# Altium PCB main.PcbDoc
Units mil, origin at the board's own origin, x right, y up, seen from the top; angles counter-clockwise.
Board outline 5980 x 2825 mil, 2 copper layers (Top Layer, Bottom Layer); 50 components, 112 nets, 316 pads, 0 vias.
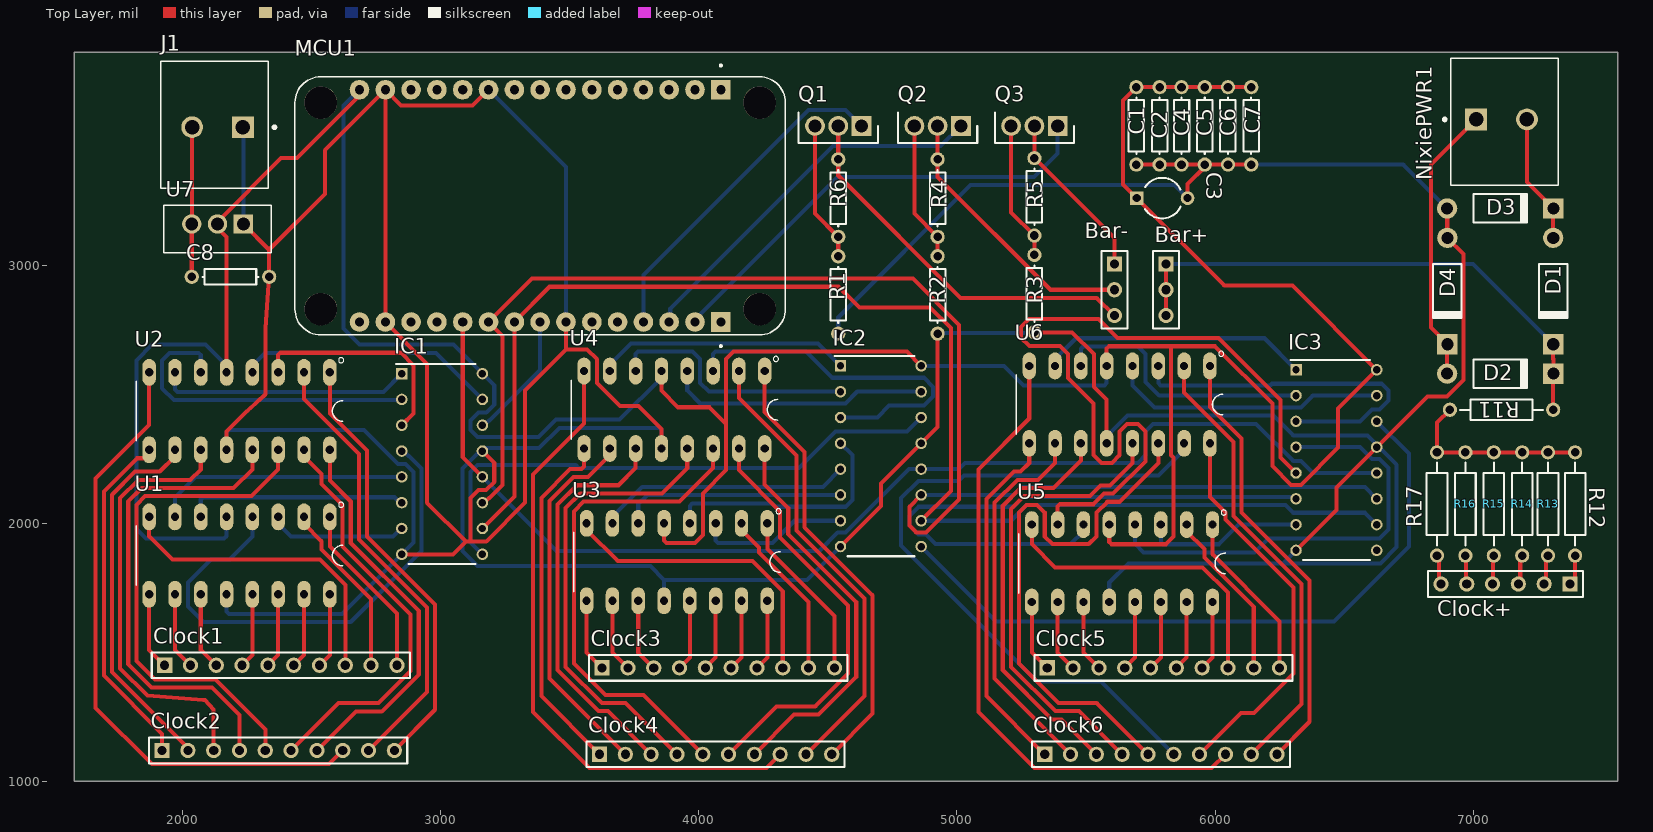
[diagram p0: Top Layer view]
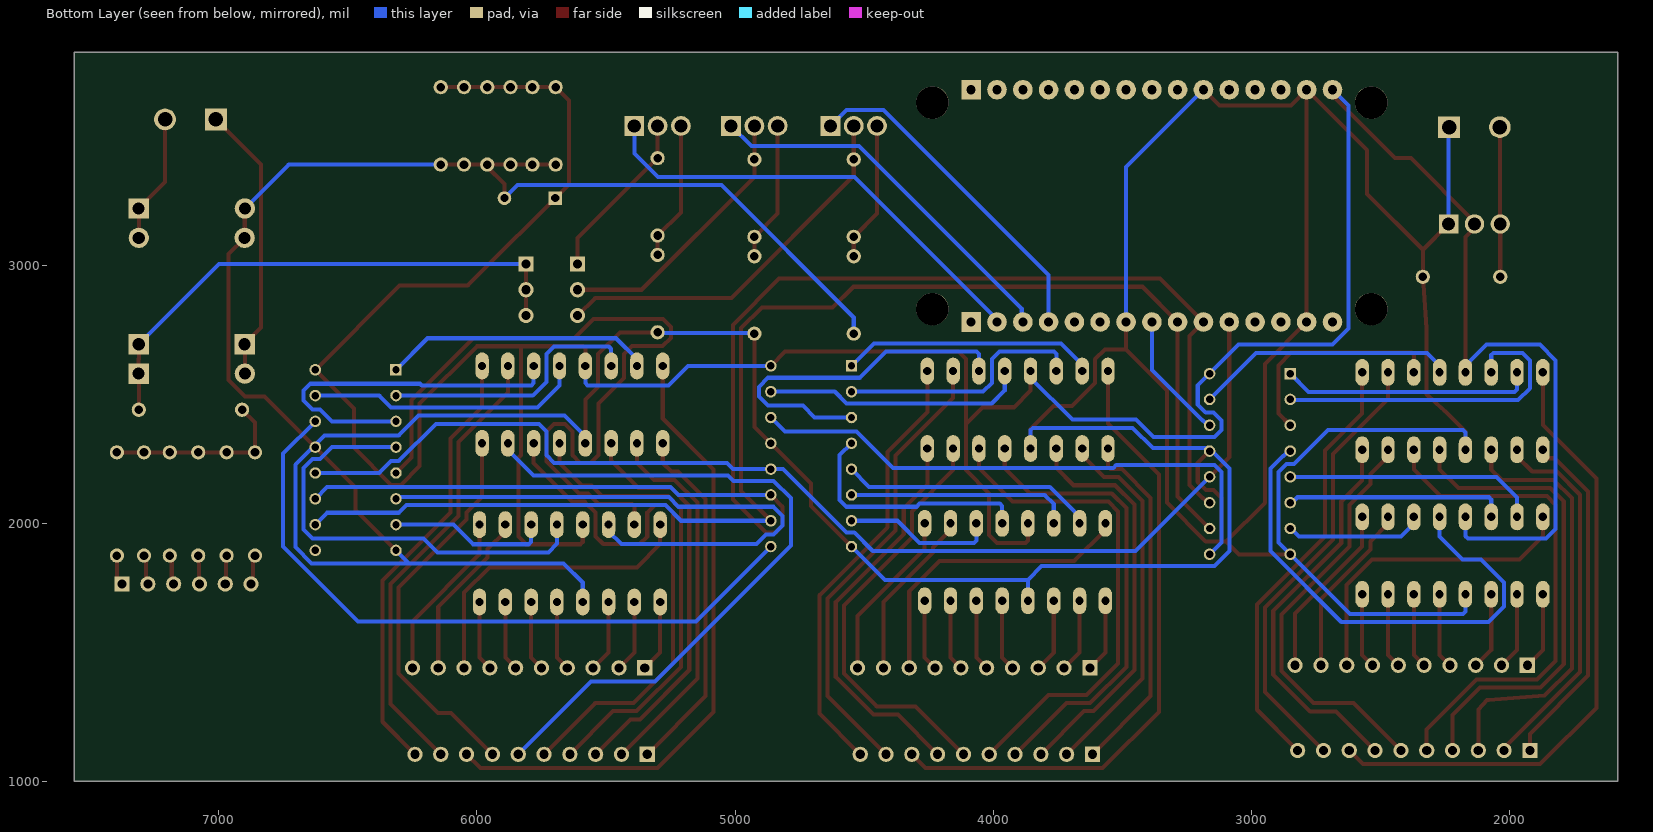
[diagram p1: Bottom Layer view, seen from below]

## Layer stack, top to bottom
Top Solder: solder mask 0.4, Solder Resist, Dk 3.5
Top Layer: signal copper 1.4
Dielectric 1: dielectric 12.6, FR-4, Dk 4.8
Bottom Layer: signal copper 1.4
Bottom Solder: solder mask 0.4, Solder Resist, Dk 3.5

## Board outline
1580,1000 7560,1000 7560,3825 1580,3825

## Design rules (kind name [scope] priority, off if disabled: settings)
Clearance [All] p1: gap=15.75 ignorepadtopadclearanceinfootprint=FALSE
PolygonConnect [All] p1: connectstyle=Relief reliefconductorwidth=10 reliefentries=4 polygonreliefangle="90 Angle" airgapwidth=10
RoomDefinition main [InComponentClass('main')] p1 off: confinementstyle=ConfineIn formatcopy=TRUE lockcomponents=FALSE outline 9355,1015 26315,1015 26315,3055 9355,3055
RoutingTopology [All] p1: topology=Daisy_Balanced
RoutingVias [All] p1: holewidth=19.68 width=51.18 viastyle="Through Hole" minholewidth=19.68 minwidth=51.18 maxholewidth=19.68 maxwidth=51.18
SolderMaskExpansion [All] p1: expansion=4 istentingtop=FALSE
UnRoutedNet [All] p1: checkbadconnections=TRUE
Width [All] p1: maxlimit=15.75 minlimit=15.75 preferedwidth=15.75
28 further rules are at their usual default settings.

## Components (designator, comment, footprint, x,y, rotation, side; value= is the part's Value field where it differs from the comment)
Bar+ "Header 3" HDR1X3 5810,3005 r270 top
Bar- "Header 3" HDR1X3 5610,3005 r270 top
C1 "Cap" AXIAL-0.3 5695,3540 r270 top value=100pF
C2 "Cap" AXIAL-0.3 5785,3540 r270 top value=100pF
C3 "Cap Pol1" CAPR5-4X5 5795,3260 r0 top value=100pF
C4 "Cap" AXIAL-0.3 5870,3540 r90 top value=0.1uF
C5 "Cap" AXIAL-0.3 5960,3540 r90 top value=0.1uF
C6 "Cap" AXIAL-0.3 6050,3540 r90 top value=0.1uF
C7 "Cap" AXIAL-0.3 6140,3540 r90 top value=0.1uF
C8 "Cap" AXIAL-0.3 2185,2955 r180 top value=0.3uF
Clock1 "Header 10" HDR1X10 1930,1450 r0 top
Clock2 "Header 10" HDR1X10 1920,1120 r0 top
Clock3 "Header 10" HDR1X10 3625,1440 r0 top
Clock4 "Header 10" HDR1X10 3615,1105 r0 top
Clock5 "Header 10" HDR1X10 5350,1440 r0 top
Clock6 "Header 10" HDR1X10 5340,1105 r0 top
Clock+ "Header 6" HDR1X6 7375,1765 r180 top (schematic designator Clock+1)
D1 "Diode 1N4001" DO-41 7310,2900 r270 top
D2 "Diode 1N4001" DO-41 7105,2580 r0 top
D3 "Diode 1N4001" DO-41 7105,3220 r0 top
D4 "Diode 1N4001" DO-41 6900,2900 r270 top
IC1 "SN74HC595NE4" DIP794W53P254L1930H508Q16N 3005,2230 r0 top
IC2 "SN74HC595NE4" DIP794W53P254L1930H508Q16N 4705,2260 r0 top
IC3 "SN74HC595NE4" DIP794W53P254L1930H508Q16N 6470,2245 r0 top
J1 "AK300/2-5,0-GRAU" *PTR_AK300/2-5,0-GRAU 2135,3535 r180 top
MCU1 "113990105" *SEEED_113990105_113990105(Primary) 3385,3230 r270 top
NixiePWR1 "AK300/2-5,0-GRAU" *PTR_AK300/2-5,0-GRAU 7110,3565 r0 top
Q1 "MJE13003G" TO229P300X760X1364-3P 4630.16,3540 r180 top
Q2 "MJE13003G" TO229P300X760X1364-3P 5015.16,3540 r180 top
Q3 "MJE13003G" TO229P300X760X1364-3P 5390.16,3540 r180 top
R1 "330" AXIAL-0.3 4540,2885 r270 top
R2 "330" AXIAL-0.3 4925,2885 r270 top
R3 "330" AXIAL-0.3 5300,2890 r270 top
R4 "330" AXIAL-0.3 4925,3260 r270 top
R5 "330" AXIAL-0.3 5300,3265 r270 top
R6 "330" AXIAL-0.3 4540,3260 r270 top
R11 "Res2" AXIAL-0.4 7110,2440 r180 top value=1K
R12 "Res2" AXIAL-0.4 7395,2075 r270 top value=1K
R13 "Res2" AXIAL-0.4 7290,2075 r270 top value=1K
R14 "Res2" AXIAL-0.4 7190,2075 r270 top value=1K
R15 "Res2" AXIAL-0.4 7080,2075 r270 top value=1K
R16 "Res2" AXIAL-0.4 6970,2075 r270 top value=1K
R17 "Res2" AXIAL-0.4 6860,2075 r270 top value=1K
U1 "SN74141N" *DIP762W46P254L2134H508Q16 2220,1875 r270 top
U2 "SN74141N" *DIP762W46P254L2134H508Q16 2220,2435 r270 top
U3 "SN74141N" *DIP762W46P254L2134H508Q16 3915,1850 r270 top
U4 "SN74141N" *DIP762W46P254L2134H508Q16 3905,2440 r270 top
U5 "SN74141N" *DIP762W46P254L2134H508Q16 5640,1845 r270 top
U6 "SN74141N" *DIP762W46P254L2134H508Q16 5630,2460 r270 top
U7 "LM1117T-3.3V" *TO254P470X1016X2222-3P 2035,3120 r180 top

## Footprints (in the part's own frame and the unit in brackets; to place one, negate y for a bottom-side part, rotate by r counter-clockwise, add the part's x,y. Pads: shape width x height; smd on the part's side, far side on the other; paste and mask are expansions set on the pad)
*DIP762W46P254L2134H508Q16 [mil]
  oval 104x52 hole 32: 1(-150,350) 2(-150,250) 3(-150,150) 4(-150,50) 5(-150,-50) 6(-150,-150) 7(-150,-250) 8(-150,-350) 9(150,-350) 10(150,-250) 11(150,-150) 12(150,-50) 13(150,50) 14(150,150) 15(150,250) 16(150,350)
  silkscreen extent -207,-400 115,404
*PTR_AK300/2-5,0-GRAU [mm]
  rect 2.145x2.145 hole 1.43: 1(-2.5,0)
  round 2.145 hole 1.43: 2(2.5,0)
  silkscreen extent -5.74,-6.5 5.6,6
*SEEED_113990105_113990105(Primary) [mm]
  rect 1.93x1.93 hole 0.889: J1_1(-11.43,17.78) J2_1(11.43,17.78)
  round 1.93 hole 0.889: J1_2(-11.43,15.24) J1_3(-11.43,12.7) J1_4(-11.43,10.16) J1_5(-11.43,7.62) J1_6(-11.43,5.08) J1_7(-11.43,2.54) J1_8(-11.43,0) J1_9(-11.43,-2.54) J1_10(-11.43,-5.08) J1_11(-11.43,-7.62) J1_12(-11.43,-10.16) J1_13(-11.43,-12.7) J1_14(-11.43,-15.24) J1_15(-11.43,-17.78) J2_2(11.43,15.24) J2_3(11.43,12.7) J2_4(11.43,10.16) J2_5(11.43,7.62) J2_6(11.43,5.08) J2_7(11.43,2.54) J2_8(11.43,0) J2_9(11.43,-2.54) J2_10(11.43,-5.08) J2_11(11.43,-7.62) J2_12(11.43,-10.16) J2_13(11.43,-12.7) J2_14(11.43,-15.24) J2_15(11.43,-17.78)
  round 3.2 hole 3.2 unplated: None(-10.16,21.59) None(-10.16,-21.59) None(10.16,21.59) None(10.16,-21.59)
  silkscreen extent -13.91,-24.13 13.91,24.13
*TO254P470X1016X2222-3P [mil]
  rect 75x75 hole 50: 1(-200,-40)
  round 75 hole 50: 2(-100,-40) 3(0,-40)
  silkscreen extent -308,-112 108,72
AXIAL-0.3 [mm] "Axial Device, Thru-Hole; 2 Leads; 0.3 in Pin Spacing"
  round 1.4 hole 0.85: 1(-3.81,0) 2(3.81,0)
  silkscreen extent -2.77,-0.76 2.77,0.76
AXIAL-0.4 [mm] "Axial Device, Thru-Hole; 2 Leads; 0.4 in Pin Spacing"
  round 1.4 hole 0.85: 1(-5.08,0) 2(5.08,0)
  silkscreen extent -4.06,-1.02 4.06,1.02
CAPR5-4X5 [mm] "Capacitor; 2 Leads"
  rect 1.35x1.35 hole 0.8: 1(-2.5,0)
  round 1.35 hole 0.8: 2(2.5,0)
  silkscreen extent -1.69,-2 1.82,2
DIP794W53P254L1930H508Q16N [mm]
  rect 1.13x1.13 hole 0.73: 1(-3.97,8.89)
  round 1.13 hole 0.73: 2(-3.97,6.35) 3(-3.97,3.81) 4(-3.97,1.27) 5(-3.97,-1.27) 6(-3.97,-3.81) 7(-3.97,-6.35) 8(-3.97,-8.89) 9(3.97,-8.89) 10(3.97,-6.35) 11(3.97,-3.81) 12(3.97,-1.27) 13(3.97,1.27) 14(3.97,3.81) 15(3.97,6.35) 16(3.97,8.89)
  silkscreen extent -4.54,-9.84 3.3,9.84, body extent -4.1,-9.65 4.1,9.65, height 5.08
DO-41 [mm] "Diode, Axial; Body 5.2 x 2.7 mm (LxDia. max), Lead Dia. 0.86 mm (max)"
  round 2 hole 1.2: 1(-5.23,0)
  rect 2x2 hole 1.2: 2(5.23,0)
  silkscreen extent -2.65,-1.4 2.75,1.4
HDR1X3 [mm] "Connector; Header; 3 Position"
  rect 1.5x1.5 hole 0.9: 1(0,0)
  round 1.5 hole 0.9: 2(2.54,0) 3(5.08,0)
  silkscreen extent -1.27,-1.27 6.35,1.27
HDR1X6 [mm] "Connector; Header; 6 Position"
  rect 1.5x1.5 hole 0.9: 1(0,0)
  round 1.5 hole 0.9: 2(2.54,0) 3(5.08,0) 4(7.62,0) 5(10.16,0) 6(12.7,0)
  silkscreen extent -1.27,-1.27 13.97,1.27
HDR1X10 [mm] "Connector; Header; 10 Position"
  rect 1.5x1.5 hole 0.9: 1(0,0)
  round 1.5 hole 0.9: 2(2.54,0) 3(5.08,0) 4(7.62,0) 5(10.16,0) 6(12.7,0) 7(15.24,0) 8(17.78,0) 9(20.32,0) 10(22.86,0)
  silkscreen extent -1.27,-1.27 24.13,1.27
TO229P300X760X1364-3P [mm]
  rect 1.95x1.95 hole 1.3: 1(0,0)
  round 1.95 hole 1.3: 2(2.29,0) 3(4.58,0)
  silkscreen extent -1.61,-1.32 6.19,1.68, body extent -1.51,-1.32 6.09,1.69, height 12.76

## Part data
Bar+ Bar-: "Header, 3-Pin", LatestRevisionDate=17-Jul-2002, LatestRevisionNote="Re-released for DXP Platform.", Publisher="Altium Limited"
C1 C2 C4 C5 C6 C7 C8: "Capacitor", LatestRevisionDate=17-Jul-2002, LatestRevisionNote="Re-released for DXP Platform.", PackageDescription="Radial Cap, Thru-Hole; 2 Leads; 0.3 in Pin Spacing", PackageReference=RAD-0.3, Published=8-Jun-2000, Publisher="Altium Limited"
C3: "Polarized Capacitor (Radial)", LatestRevisionDate=17-Jul-2002, LatestRevisionNote="Re-released for DXP Platform.", PackageDescription="Polarized Capacitor (Radial); 2 Leads", PackageReference=RB7.6-15, Published=8-Jun-2000, Publisher="Altium Limited"
Clock1 Clock2 Clock3 Clock4 Clock5 Clock6: "Header, 10-Pin", LatestRevisionDate=17-Jul-2002, LatestRevisionNote="Re-released for DXP Platform.", Publisher="Altium Limited"
Clock+: "Header, 6-Pin", LatestRevisionDate=17-Jul-2002, LatestRevisionNote="Re-released for DXP Platform.", Publisher="Altium Limited"
D1 D2 D3 D4: "1 Amp General Purpose Rectifier", Code_JEDEC=DO-204-AL, ComponentLink1Description="Manufacturer Link", ComponentLink1URL=http://www.fairchildsemi.com/, ComponentLink2Description=Datasheet, ComponentLink2URL=http://www.fairchildsemi.com/ds/1N%2F1N4001.pdf, DatasheetVersion=1998, LatestRevisionDate=17-Jul-2002, LatestRevisionNote="Re-released for DXP Platform.", PackageDescription="Diode, Axial; Body 5.2 x 2.7 mm (LxDia. max), Lead Dia. 0.86 mm (max)", PackageReference=DO-41, PackageVersion=Aug-1999, Published=8-Jun-2000, Publisher="Altium Limited"
IC1 IC2 IC3: "Integrated Circuit", Manufacturer_Name="Texas Instruments", Mouser Part Number=595-SN74HC595NE4, Datasheet Link=http://www.ti.com/lit/ds/symlink/sn74hc595.pdf, Height=5.08mm, Manufacturer_Part_Number=SN74HC595NE4, Mouser Price/Stock=https://www.mouser.com/Search/Refine.aspx?Keyword=595-SN74HC595NE4
J1 NixiePWR1: "Terminal block; 5mm; angled 45Â°; ways: 2", Package=None, Availability=Unavailable, MF="PTR Messtechnik", MP=AK300/2-5,0-GRAU, Price=None, SnapEDA_Link=https://www.snapeda.com/parts/AK300/2-5%2C0-GRAU/PTR%20Messtechnik/view-part/556894/?ref=snap
MCU1: "An open-source firmware and development kit that helps you to Prototype your IOT product within a few Lua script lines", Package=None, Availability=Unavailable, MF="Seeed Technology", MP="NodeMCU v2", Price=None, SnapEDA_Link=https://www.snapeda.com/parts/NodeMCU%20v2/Seeed%20Technology%20Co.%2C%20Ltd/view-part/378076/?ref=snap
Q1 Q2 Q3: "Transistor BJT NPN", Manufacturer_Name="ON Semiconductor", Mouser Part Number=863-MJE13003G, Datasheet Link=https://www.onsemi.com/pub/Collateral/MJE13003-D.PDF, Height=3mm, Manufacturer_Part_Number=MJE13003G, Mouser Price/Stock=https://www.mouser.com/Search/Refine.aspx?Keyword=863-MJE13003G
R1 R2 R3 R4 R5 R6: library part Res1, "Resistor", LatestRevisionDate=17-Jul-2002, LatestRevisionNote="Re-released for DXP Platform.", PackageDescription="Axial Device, Thru-Hole; 2 Leads; 0.3 in Pin Spacing", PackageReference=AXIAL-0.3, Published=8-Jun-2000, Publisher="Altium Limited"
R11 R12 R13 R14 R15 R16 R17: "Resistor", LatestRevisionDate=17-Jul-2002, LatestRevisionNote="Re-released for DXP Platform.", PackageDescription="Axial Device, Thru-Hole; 2 Leads; 0.4 in Pin Spacing", PackageReference=AXIAL-0.4, Published=8-Jun-2000, Publisher="Altium Limited"
U1 U2 U3 U4 U5 U6: "BCD to DECIMAL Decoder/Driver", Package=None, Availability=Unavailable, MF="Texas Instruments", MP=SN74141N, Price=None, SnapEDA_Link=https://www.snapeda.com/parts/SN74141N/Texas%20Instruments/view-part/454163/?ref=snap
U7: library part LM1117T-5.0, "Linear Voltage Regulator IC 1 Output 800mA TO-220-3", Package=None, Availability=Unavailable, MF="Texas Instruments", MP=LM1117T50, Price=None, SnapEDA_Link=https://www.snapeda.com/parts/LM1117T50/Texas%20Instruments/view-part/53993/?ref=snap

## Nets (pads, with @x,y where several pads share a name; then routed paths per layer and width w, separated by ;. In a path a pad name is that pad's centre, name@x,y a point inside that pad or via, vN(x,y) a via of type N, cw(c..) or ccw(c..) an arc to the next point about the centre after c; other vN are vias at no path point)
+5: C1.1 C2.1 C3.1 C4.2 C5.2 C6.2 C7.2 IC1.16 IC2.16 IC3.16 MCU1.J1_15 U1.5 U2.5 U3.5 U4.5 U5.5 U6.5 U7.2 | length 13527.4
  Top Layer w15.75: U2.5 2170,3108.97 2135,3143.97 2135,3168.41 2381.36,3414.77 2442.26,3414.77 2673.47,3645.98 2673.47,3668.47 MCU1.J1_15 ; U4.5 3855,2514.38 3919.69,2449.69 4040.31,2449.69 4105,2385 ; U3.5 3865,1933.22 3874.22,1924 3985.18,1924 4015.38,1954.2 4015.38,2116.29 4105,2205.92 4105,2385 ; IC2.16 4805.68,2665.62 4134.45,2665.62 4105.38,2636.55 4105.38,2385.38 4105,2385 ; U6.5 5580,2676.78 5589.23,2686 5830,2686 ; U5.5 5590,1928.22 5599.23,1919 5810.18,1919 5839.62,1948.45 5839.62,2254.2 5830,2263.82 5830,2686 ; C7.2 C1.1 5643.82,3638.82 5643.82,3312.76 6035.67,2920.9 6300.4,2920.9 IC3.16 6476.75,2445.45 6476.75,2293.18 6332.7,2149.13 6294.7,2149.13 6222.03,2221.81 6222.03,2464.15 6000.18,2686 5830,2686
  Bottom Layer w15.75: U1.5 2170,1950 2160.78,1940.78 1858.05,1940.78 1820.38,1978.45 1820.38,2631.55 1880.94,2692.12 2088.88,2692.12 2170,2611 U2.5 ; MCU1.J1_15 2623.39,3618.39 2623.39,2754.48 2685.75,2692.12 3049.18,2692.12 3207.17,2534.13 3207.17,2461 3176.16,2430 3146.44,2430 3115.43,2399 3115.43,2361 3142.3,2334.13 3378.81,2334.13 3446.18,2401.5 3692.5,2401.5 3855,2564 U4.5 ; IC2.16 5181.93,2610 5257.93,2534 5570.77,2534 5580,2543.22 U6.5
GND: C1.2 C2.2 C3.2 C4.1 C5.1 C6.1 C7.1 C8.1 D3.1 D4.1 IC1.8 IC1.13 IC2.8 IC2.13 IC3.8 IC3.13 J1.1 MCU1.J1_10 MCU1.J1_14 MCU1.J2_7 MCU1.J2_14 R1.2 R2.2 R3.2 U1.12 U2.12 U3.12 U4.12 U5.12 U6.12 U7.1 | length 22451
  Top Layer w15.75: U2.12 2170,2355 2250,2435 2320,2500 2320,2755 C8.1 2335,3060 ; U7.1 2335,3060 ; IC1.8 3047,1880 3097,1930 ; IC1.13 3207.17,2234.13 3207.17,2161 3175.95,2129.78 3146.22,2129.78 3115,2098.56 3115,1930 ; MCU1.J1_10 3123.39,3618.39 2846.61,3618.39 MCU1.J1_14 ; MCU1.J2_7 3485,2674 ; U4.12 3855,2365.62 3766.09,2454.53 3694.29,2454.53 3605.38,2543.45 3605.38,2635.8 3567.18,2674 3485,2674 ; IC2.8 4705,2066.3 4705,2153.7 4925,2373.7 R2.2 ; R3.2 5446.18,2740 5530.38,2655.8 5530.38,2529.08 5580,2479.46 U6.12 ; C1.2 C5.1 ; C3.2 5893.43,3314.32 5960,3380.89 C5.1 ; C7.1 C5.1 ; IC3.8 6470,2051.3 6470,2138.7 6822.48,2491.18 6899.36,2491.18 6962.99,2554.81 6962.99,3042.91 6899.55,3106.36 6899.55,3219.55 D3.1 ; 2335,3060 2550.63,3275.63 2550.63,3445.63 MCU1.J1_14 ; MCU1.J1_14 MCU1.J2_14 2947.37,2617.63 2947.37,2079.63 3097,1930 ; 3097,1930 3115,1930 ; 3115,1930 3176.16,1930 3326.4,2080.24 3326.4,2515.4 3485,2674
  Bottom Layer w15.75: U1.12 2170,1658.22 2179.22,1649 2617.7,1649 2894.57,1925.87 2894.57,2199 2863.56,2230 2833.84,2230 2702.84,2361 2179.22,2361 2170,2351.78 U2.12 ; J1.1 2235,3533.43 U7.1 ; MCU1.J1_10 3485,3380 MCU1.J2_7 ; U4.12 3855,2360.78 3845.78,2370 3459.22,2370 3380.24,2291.02 3162.92,2291.02 3083.94,2212.04 3083.94,1892.5 3142.3,1834.13 3811.87,1834.13 3865,1781 ; U3.12 3865,1781 ; R1.2 4540,2797.38 5052.82,3310.2 5843.23,3310.2 C3.2 ; IC2.8 4419.7,1781 3865,1781 ; R2.2 4927.5,2737.5 5297.5,2737.5 R3.2 ; U6.12 5580,2336 5661.12,2417.12 6226.72,2417.12 6302.97,2340.87 6589.84,2340.87 6703.66,2227.04 6703.66,1907.5 6641.16,1845 6263.7,1845 ; U5.12 5590,1770.62 5664.38,1845 6263.7,1845 ; C7.1 6729.09,3390 D3.1 ; IC3.8 6263.7,1845
NetBar+_1: Bar+.1 Bar+.2 Bar+.3 D1.2 D2.2 R11.1 | length 2083.6
  Top Layer w15.75: Bar+.3 Bar+.2 Bar+.1 ; R11.1 7310,2579.09 D2.2 7310.91,2636 7310,2636.91 D1.2
  Bottom Layer w15.75: Bar+.1 6999.09,3005 D1.2
NetBar-_1: Bar-.1 Q3.2 R5.1 | length 663.4
  Top Layer w15.75: Q3.2 R5.1 5610,3105 Bar-.1
NetBar-_2: Bar-.2 Q2.2 R4.1 | length 1063.6
  Top Layer w15.75: Q2.2 R4.1 4925,3342.62 5362.62,2905 Bar-.2
NetBar-_3: Bar-.3 Q1.2 R6.1 | length 1487.1
  Top Layer w15.75: Q1.2 R6.1 4540,3347.62 5014.11,2873.5 5541.5,2873.5 Bar-.3
NetC8_2: C8.2 J1.2 U7.3 | length 580.7
  Top Layer w15.75: C8.2 U7.3 2035.79,3160.79 2035.79,3534.21 J1.2
NetClock1_1: Clock1.1 U1.9 | length 299.9
  Top Layer w15.75: U1.9 1870,1510 Clock1.1
NetClock1_2: Clock1.2 U1.10 | length 299.9
  Top Layer w15.75: U1.10 1970,1510 Clock1.2
NetClock1_3: Clock1.3 U1.11 | length 299.9
  Top Layer w15.75: U1.11 2070,1510 Clock1.3
NetClock1_4: Clock1.4 U1.13 | length 291.6
  Top Layer w15.75: Clock1.4 2270,1490 U1.13
NetClock1_5: Clock1.5 U1.14 | length 291.6
  Top Layer w15.75: Clock1.5 2370,1490 U1.14
NetClock1_6: Clock1.6 U1.15 | length 291.6
  Top Layer w15.75: Clock1.6 2470,1490 U1.15
NetClock1_7: Clock1.7 U1.16 | length 291.6
  Top Layer w15.75: Clock1.7 2570,1490 U1.16
NetClock1_8: Clock1.8 U1.8 | length 1224.4
  Top Layer w15.75: U1.8 1870,1950 1960.27,1859.73 2531.44,1859.73 2630,1761.18 Clock1.8
NetClock1_9: Clock1.9 U1.2 | length 682.7
  Top Layer w15.75: U1.2 2470,1999 2538.5,1930.5 2538.5,1897.95 2730,1706.46 Clock1.9
NetClock1_10: Clock1.10 U1.1 | length 682.7
  Top Layer w15.75: U1.1 2570,1911 2830,1651 Clock1.10
NetClock2_1: Clock2.1 U2.9 | length 1349.1
  Top Layer w15.75: U2.9 1870,2268.81 1853.25,2252.06 1822.72,2252.06 1694.39,2123.74 1694.39,1410.15 1920,1184.54 Clock2.1
NetClock2_2: Clock2.2 U2.10 | length 1444.1
  Top Layer w15.75: U2.10 1970,2259 1911,2200 1815.2,2200 1725.89,2110.69 1725.89,1423.19 2020,1129.08 Clock2.2
NetClock2_3: Clock2.3 U2.11 | length 1675.8
  Top Layer w15.75: U2.11 2070,2209.38 2029.13,2168.5 1828.24,2168.5 1757.39,2097.65 1757.39,1438.07 1862.81,1332.64 2080.14,1315.7 2086.29,1315.22 2120,1278.79 Clock2.3
NetClock2_4: Clock2.4 U2.13 | length 1888.8
  Top Layer w15.75: Clock2.4 2220,1257.14 2113.63,1363.5 1879.49,1363.5 1788.88,1454.11 1788.88,2084.6 1841.29,2137.01 2197.63,2137.01 2270,2209.38 U2.13
NetClock2_5: Clock2.5 U2.14 | length 1978
  Top Layer w15.75: Clock2.5 2320,1201.68 2126.68,1395 1892.54,1395 1820.38,1467.16 1820.38,2071.55 1854.34,2105.51 2266.13,2105.51 2370,2209.38 U2.14
NetClock2_6: Clock2.6 U2.15 | length 1618.9
  Top Layer w15.75: Clock2.6 2603.11,1303.11 2758.27,1303.11 2883.15,1427.99 2883.15,1647.06 2619.62,1910.59 2619.62,2071.55 2538.5,2152.67 2538.5,2190.5 2470,2259 U2.15
NetClock2_7: Clock2.7 U2.16 | length 1529.6
  Top Layer w15.75: Clock2.7 2671.61,1271.61 2771.32,1271.61 2914.65,1414.94 2914.65,1660.11 2651.12,1923.63 2651.12,2084.6 2570,2165.72 U2.16
NetClock2_8: Clock2.8 U2.8 | length 2455.5
  Top Layer w15.75: U2.8 1870,2381.18 1662.9,2174.07 1662.9,1284.64 1880.69,1066.85 2566.85,1066.85 Clock2.8
NetClock2_9: Clock2.9 U2.2 | length 1755.9
  Top Layer w15.75: U2.2 2470,2481.18 2682.61,2268.56 2682.61,1936.68 2946.14,1673.15 2946.14,1346.14 Clock2.9
NetClock2_10: Clock2.10 U2.1 | length 1699.1
  Top Layer w15.75: U2.1 2570,2425.72 2714.11,2281.61 2714.11,1949.73 2977.64,1686.2 2977.64,1277.64 Clock2.10
NetClock3_1: Clock3.1 U3.9 | length 284.9
  Top Layer w15.75: U3.9 3565,1500 Clock3.1
NetClock3_2: Clock3.2 U3.10 | length 284.9
  Top Layer w15.75: U3.10 3665,1500 Clock3.2
NetClock3_3: Clock3.3 U3.11 | length 284.9
  Top Layer w15.75: U3.11 3765,1500 Clock3.3
NetClock3_4: Clock3.4 U3.13 | length 276.6
  Top Layer w15.75: Clock3.4 3965,1480 U3.13
NetClock3_5: Clock3.5 U3.14 | length 276.6
  Top Layer w15.75: Clock3.5 4065,1480 U3.14
NetClock3_6: Clock3.6 U3.15 | length 276.6
  Top Layer w15.75: Clock3.6 4165,1480 U3.15
NetClock3_7: Clock3.7 U3.16 | length 276.6
  Top Layer w15.75: Clock3.7 4265,1480 U3.16
NetClock3_8: Clock3.8 U3.8 | length 1180.7
  Top Layer w15.75: U3.8 3565,1974 3685.69,1853.31 4207.87,1853.31 4325,1736.18 Clock3.8
NetClock3_9: Clock3.9 U3.2 | length 667.7
  Top Layer w15.75: U3.2 4165,1974 4233.5,1905.5 4233.5,1887.21 4425,1695.72 Clock3.9
NetClock3_10: Clock3.10 U3.1 | length 667.7
  Top Layer w15.75: U3.1 4265,1900.26 4525,1640.26 Clock3.10
NetClock4_1: Clock4.1 U4.9 | length 1372.9
  Top Layer w15.75: U4.9 3555,2220.22 3545.27,2210.5 3501.15,2210.5 3389.39,2098.74 3389.39,1330.61 Clock4.1
NetClock4_2: Clock4.2 U4.10 | length 1436.5
  Top Layer w15.75: U4.10 3655,2264 3570,2179 3514.2,2179 3420.89,2085.69 3420.89,1399.11 Clock4.2
NetClock4_3: Clock4.3 U4.11 | length 1576.2
  Top Layer w15.75: U4.11 3755,2214.38 3688.13,2147.5 3527.24,2147.5 3452.39,2072.65 3452.39,1431.07 3611.28,1272.18 3647.82,1272.18 Clock4.3
NetClock4_4: Clock4.4 U4.13 | length 1797.9
  Top Layer w15.75: Clock4.4 3716.33,1303.67 3624.32,1303.67 3483.88,1444.11 3483.88,2059.6 3540.29,2116.01 3856.63,2116.01 3955,2214.38 U4.13
NetClock4_5: Clock4.5 U4.14 | length 1919.6
  Top Layer w15.75: Clock4.5 3784.83,1335.17 3637.37,1335.17 3515.38,1457.16 3515.38,2046.55 3553.34,2084.51 3925.13,2084.51 4055,2214.38 U4.14
NetClock4_6: Clock4.6 U4.15 | length 1640.1
  Top Layer w15.75: Clock4.6 4300.61,1290.61 4450.77,1290.61 4578.15,1417.99 4578.15,1682.06 4314.62,1945.59 4314.62,2046.55 4155,2206.18 U4.15
NetClock4_7: Clock4.7 U4.16 | length 1550.8
  Top Layer w15.75: Clock4.7 4369.11,1259.11 4463.82,1259.11 4609.65,1404.94 4609.65,1695.11 4346.12,1958.63 4346.12,2059.6 4255,2150.72 U4.16
NetClock4_8: Clock4.8 U4.8 | length 2471.3
  Top Layer w15.75: U4.8 3555,2386.18 3357.9,2189.07 3357.9,1269.64 3575.69,1051.85 4261.85,1051.85 Clock4.8
NetClock4_9: Clock4.9 U4.2 | length 1780
  Top Layer w15.75: U4.2 4155,2486.18 4377.61,2263.56 4377.61,1971.68 4641.14,1708.15 4641.14,1331.14 Clock4.9
NetClock4_10: Clock4.10 U4.1 | length 1723.3
  Top Layer w15.75: U4.1 4255,2430.72 4409.11,2276.61 4409.11,1984.73 4672.64,1721.2 4672.64,1262.64 Clock4.10
NetClock5_1: Clock5.1 U5.9 | length 279.9
  Top Layer w15.75: U5.9 5290,1500 Clock5.1
NetClock5_2: Clock5.2 U5.10 | length 279.9
  Top Layer w15.75: U5.10 5390,1500 Clock5.2
NetClock5_3: Clock5.3 U5.11 | length 279.9
  Top Layer w15.75: U5.11 5490,1500 Clock5.3
NetClock5_4: Clock5.4 U5.13 | length 271.6
  Top Layer w15.75: Clock5.4 5690,1480 U5.13
NetClock5_5: Clock5.5 U5.14 | length 271.6
  Top Layer w15.75: Clock5.5 5790,1480 U5.14
NetClock5_6: Clock5.6 U5.15 | length 271.6
  Top Layer w15.75: Clock5.6 5890,1480 U5.15
NetClock5_7: Clock5.7 U5.16 | length 271.6
  Top Layer w15.75: Clock5.7 5990,1480 U5.16
NetClock5_8: Clock5.8 U5.8 | length 1204.8
  Top Layer w15.75: U5.8 5290,1919.38 5379.96,1829.42 5951.76,1829.42 6050,1731.18 Clock5.8
NetClock5_9: Clock5.9 U5.2 | length 662.7
  Top Layer w15.75: U5.2 5890,1969 5958.5,1900.5 5958.5,1867.21 6150,1675.72 Clock5.9
NetClock5_10: Clock5.10 U5.1 | length 662.7
  Top Layer w15.75: U5.1 5990,1880.26 6250,1620.26 Clock5.10
NetClock6_1: Clock6.1 U6.9 | length 1381.7
  Top Layer w15.75: U6.9 5280,2234.38 5245.62,2200 5220.66,2200 5114.39,2093.74 5114.39,1330.61 Clock6.1
NetClock6_2: Clock6.2 U6.10 | length 1470.9
  Top Layer w15.75: U6.10 5380,2234.38 5314.13,2168.51 5233.7,2168.51 5145.89,2080.69 5145.89,1399.11 Clock6.2
NetClock6_3: Clock6.3 U6.11 | length 1576.5
  Top Layer w15.75: U6.11 5480,2242.99 5374.02,2137.01 5246.75,2137.01 5177.39,2067.65 5177.39,1431.07 5367.95,1240.5 5404.5,1240.5 Clock6.3
NetClock6_4: Clock6.4 U6.13 | length 1803.3
  Top Layer w15.75: Clock6.4 5473,1272 5381,1272 5208.88,1444.11 5208.88,2054.6 5259.8,2105.51 5515.25,2105.51 5556.24,2146.5 5592.12,2146.5 5680,2234.38 U6.13
NetClock6_5: Clock6.5 U6.14 | length 2158.5
  Top Layer w15.75: Clock6.5 5541.5,1303.5 5394.04,1303.5 5240.38,1457.16 5240.38,2041.55 5269.45,2070.62 5310.55,2070.62 5340,2041.18 5340,1948.82 5369.45,1919.38 5510.55,1919.38 5540.38,1949.2 5540.38,2041.55 5582.33,2083.5 5629.13,2083.5 5780,2234.38 U6.14
NetClock6_6: Clock6.6 U6.15 | length 2774.2
  Bottom Layer w15.75: Clock6.6 5558.15,1386.85 5310.69,1386.85 4783.94,1913.6 4783.94,2097.5 4850.57,2164.13 5006.05,2164.13 5026.75,2184.83 5780.83,2184.83 5880,2284 U6.15
NetClock6_7: Clock6.7 U6.16 | length 1518.7
  Top Layer w15.75: Clock6.7 6100.64,1265.64 6150.8,1265.64 6303.15,1417.98 6303.15,1751.6 6039.62,2015.13 6039.62,2041.55 5980,2101.18 U6.16
NetClock6_8: Clock6.8 U6.8 | length 2491.3
  Top Layer w15.75: U6.8 5280,2406.18 5082.9,2209.07 5082.9,1269.64 5300.69,1051.85 5986.85,1051.85 Clock6.8
NetClock6_9: Clock6.9 U6.2 | length 1773.9
  Top Layer w15.75: U6.2 5880,2506.18 6071.12,2315.06 6071.12,2028.18 6334.65,1764.65 6334.65,1299.65 Clock6.9
NetClock6_10: Clock6.10 U6.1 | length 1717.2
  Top Layer w15.75: U6.1 5980,2450.72 6102.61,2328.1 6102.61,2041.22 6366.14,1777.7 6366.14,1231.14 Clock6.10
NetClock+1_1: Clock+.1 R12.2 | length 118.3
  Top Layer w15.75: Clock+.1 7395,1785 R12.2
NetClock+1_2: Clock+.2 R13.2 | length 116.2
  Top Layer w15.75: Clock+.2 7282.5,1772.5 7282.5,1867.5 R13.2
NetClock+1_3: Clock+.3 R14.2 | length 116.2
  Top Layer w15.75: Clock+.3 7182.5,1772.5 7182.5,1867.5 R14.2
NetClock+1_4: Clock+.4 R15.2 | length 112.1
  Top Layer w15.75: Clock+.4 7077.5,1767.5 7077.5,1872.5 R15.2
NetClock+1_5: Clock+.5 R16.2 | length 112.1
  Top Layer w15.75: R16.2 6972.5,1872.5 6972.5,1767.5 Clock+.5
NetClock+1_6: Clock+.6 R17.2 | length 116.2
  Top Layer w15.75: R17.2 6867.5,1867.5 6867.5,1772.5 Clock+.6
NetD1_1: D1.1 D3.2 NixiePWR1.2 | length 501.9
  Top Layer w15.75: NixiePWR1.2 7208.43,3322.48 D3.2 7310,3219.09 D1.1
NetD2_1: D2.1 D4.2 NixiePWR1.1 | length 1084.5
  Top Layer w15.75: D2.1 6899.09,2693.19 D4.2 6836.1,2757.99 6836.1,3389.53 NixiePWR1.1
NetIC1_1: IC1.1 U2.7 | length 978.7
  Bottom Layer w15.75: U2.7 1970,2518.22 1979.22,2509 2777.7,2509 IC1.1
NetIC1_2: IC1.2 U2.6 | length 1288.5
  Bottom Layer w15.75: U2.6 2070,2651.4 2060.78,2660.62 1949.45,2660.62 1920.38,2631.55 1920.38,2523.3 1966.18,2477.5 2846.2,2477.5 IC1.2
NetIC1_3: IC1.3 U2.3 | length 866.5
  Top Layer w15.75: U2.3 2370,2651.78 2379.22,2661 2845.59,2661 2894.57,2612.03 2894.57,2425.87 IC1.3
NetIC1_4: IC1.4 U1.4 | length 1961.9
  Bottom Layer w15.75: U1.4 2270,1949.38 2181.09,1860.47 2109.29,1860.47 2020.38,1771.55 2020.38,1678.45 2081.32,1617.5 2651.07,1617.5 2926.06,1892.5 2926.06,2212.04 2876.61,2261.5 2874.98,2261.5 2856.48,2280 IC1.4
NetIC1_5: IC1.5 U1.7 | length 987.2
  Bottom Layer w15.75: U1.7 1970,2100.62 2049.38,2180 IC1.5
NetIC1_6: IC1.6 U1.6 | length 858
  Bottom Layer w15.75: U1.6 2070,2091.78 2079.22,2101 2819.92,2101 2840.92,2080 IC1.6
NetIC1_7: IC1.7 U1.3 | length 537.9
  Bottom Layer w15.75: U1.3 2370,1999 2419.62,1949.38 2814.46,1949.38 2845.08,1980 IC1.7
NetIC1_9: IC1.9 IC2.14 | length 2180.8
  Bottom Layer w15.75: IC1.9 3115.43,1925.87 3115.43,2199 3142.3,2225.87 3522.96,2225.87 3534.45,2214.38 4388.21,2214.38 4529.7,2355.87 4807.16,2355.87 IC2.14
NetIC1_10: IC1.10 IC2.10 IC3.10 MCU1.J2_9 | length 5280.7
  Top Layer w15.75: IC1.10 3285,2103.7 MCU1.J2_9 3421.61,2916.61 4541.46,2916.61 4621.67,2836.41 4895.97,2836.41 4976.18,2756.2 4976.18,2124.88 IC2.10
  Bottom Layer w15.75: IC2.10 5208.82,2010 5269.45,2070.62 6273.22,2070.62 6302.97,2040.87 6580.43,2040.87 IC3.10
NetIC1_11: IC1.11 IC2.11 IC3.11 MCU1.J2_10 | length 5594.8
  Top Layer w15.75: IC1.11 3169.08,2080 3187.36,2098.29 3188.99,2098.29 3238.66,2147.96 3238.66,2726.34 MCU1.J2_10 3353.11,2948.11 4828.81,2948.11 5007.68,2769.25 5007.68,2091.51 4880.3,1964.13 4842.3,1964.13 4815.43,1991 4815.43,2064.13 IC2.11
  Bottom Layer w15.75: IC2.11 5219.74,2110 5250.61,2140.87 6580.43,2140.87 IC3.11
NetIC1_12: IC1.12 IC2.12 IC3.12 MCU1.J2_11 | length 4553
  Top Layer w15.75: MCU1.J2_11 3085,2256.3 IC1.12
  Bottom Layer w15.75: IC1.12 3448.8,1892.5 4466.34,1892.5 4537.97,1964.13 4567.7,1964.13 4813.56,2210 IC2.12 5007.37,2210 5031.75,2234.38 5700.55,2234.38 5730,2263.82 5730,2356.18 5759.45,2385.62 6158.22,2385.62 6302.97,2240.87 6332.7,2240.87 6378.57,2195 IC3.12
NetIC1_14: IC1.14 MCU1.J2_8 | length 498.2
  Bottom Layer w15.75: IC1.14 3169.08,2380 3187.58,2398.5 3189.21,2398.5 3385,2594.29 MCU1.J2_8
NetIC1_15: IC1.15 U2.4 | length 1012.7
  Bottom Layer w15.75: U2.4 2270,2611 2319.62,2660.62 2980.68,2660.62 IC1.15
NetIC2_1: IC2.1 U4.7 | length 989.4
  Bottom Layer w15.75: U4.7 3655,2616 3736.12,2697.12 4461.58,2697.12 IC2.1
NetIC2_2: IC2.2 U4.6 | length 982.5
  Bottom Layer w15.75: U4.6 3755,2656.4 3764.22,2665.62 3975.55,2665.62 4005,2636.18 4005,2543.82 4038.82,2510 IC2.2
NetIC2_3: IC2.3 U4.3 | length 1409
  Bottom Layer w15.75: U4.3 4055,2656.4 4064.22,2665.62 4415.18,2665.62 4516.67,2564.13 4872.03,2564.13 4907.16,2529 4907.16,2491 4872.03,2455.87 4737.19,2455.87 4691.32,2410 IC2.3
NetIC2_4: IC2.4 U3.4 | length 954.2
  Bottom Layer w15.75: U3.4 3965,2066.78 3974.22,2076 4285.18,2076 4297.04,2064.13 4567.7,2064.13 4594.57,2091 4594.57,2264.13 IC2.4
NetIC2_5: IC2.5 U3.7 | length 985.9
  Bottom Layer w15.75: U3.7 3665,2026 3780.5,2141.5 4480.2,2141.5 IC2.5
NetIC2_6: IC2.6 U3.6 | length 873.2
  Bottom Layer w15.75: U3.6 3765,2075 3800,2110 IC2.6
NetIC2_7: IC2.7 U3.3 | length 589.9
  Bottom Layer w15.75: U3.3 4065,1933.22 4074.22,1924 4285.18,1924 4371.18,2010 IC2.7
NetIC2_9: IC2.9 IC3.14 | length 2666.9
  Bottom Layer w15.75: IC2.9 5151.92,1619.38 6460.08,1619.38 6750.99,1910.29 6750.99,2270.31 IC3.14
NetIC2_15: IC2.15 U4.4 | length 1021.7
  Bottom Layer w15.75: U4.4 3955,2514.38 4005.24,2464.13 4567.7,2464.13 4613.56,2510 IC2.15
NetIC3_1: IC3.1 U6.7 | length 1043.9
  Bottom Layer w15.75: U6.7 5380,2636 5461.12,2717.12 6191.58,2717.12 IC3.1
NetIC3_2: IC3.2 U6.6 | length 1045.8
  Bottom Layer w15.75: U6.6 5480,2676.4 5489.23,2685.62 5700.55,2685.62 5730.38,2655.8 5730.38,2548.3 5783.68,2495 IC3.2
NetIC3_3: IC3.3 U6.3 | length 1406.7
  Bottom Layer w15.75: U6.3 5780,2543.22 5789.23,2534 6213.83,2534 6220.69,2540.87 6645.3,2540.87 6672.17,2514 6672.17,2476 6637.03,2440.87 6607.3,2440.87 6561.44,2395 IC3.3
NetIC3_4: IC3.4 U5.4 | length 1736.7
  Bottom Layer w15.75: U5.4 5690,1921 5723.5,1887.5 6153.58,1887.5 6206.94,1940.87 6637.03,1940.87 6672.17,1976 6672.17,2214 6637.03,2249.13 6607.3,2249.13 6561.44,2295 IC3.4
NetIC3_5: IC3.5 U5.7 | length 3077.1
  Top Layer w15.75: U5.7 5390,2064.78 5399.24,2074.02 5528.3,2074.02 5569.28,2115 5605.16,2115 5729.62,2239.46 5729.62,2356.55 5700.55,2385.62 5659.45,2385.62 5630,2356.18 5630,2263.82 5600.55,2234.38 5559.45,2234.38 5529.62,2264.2 5529.62,2464.2 5430.38,2563.45 5430.38,2655.8 5398.88,2687.3 5280.32,2687.3 5248.82,2718.8 5248.82,2761.2 5278.8,2791.18 5548.65,2791.18 5622.34,2717.5 6013.22,2717.5 6253.52,2477.19 6253.52,2255.18 IC3.5
NetIC3_6: IC3.6 U5.6 | length 2320.3
  Bottom Layer w15.75: U5.6 5490,1969 5440.38,1919.38 4916.78,1919.38 4880.3,1955.87 4850.57,1955.87 4815.43,1991 4815.43,2029 4850.57,2064.13 5218.42,2064.13 5256.4,2102.12 6298.81,2102.12 6305.92,2095 IC3.6
NetIC3_7: IC3.7 U5.3 | length 625.8
  Bottom Layer w15.75: U5.3 5790,1928.22 5799.23,1919 6014.57,1919 6090.57,1995 IC3.7
NetIC3_15: IC3.15 U6.4 | length 1076.2
  Bottom Layer w15.75: U6.4 5680,2534.38 5765.24,2449.13 6332.7,2449.13 6378.57,2495 IC3.15
NetMCU1_J2_2: MCU1.J2_2 Q3.1 | length 1788.3
  Bottom Layer w15.75: MCU1.J2_2 3985,2789.39 4537.3,3341.69 5299.07,3341.69 5390.16,3432.78 Q3.1
NetMCU1_J2_3: MCU1.J2_3 Q2.1 | length 1472.7
  Bottom Layer w15.75: MCU1.J2_3 3889.13,2784.13 3889.13,2831.51 4518.8,3461.18 4936.34,3461.18 Q2.1
NetMCU1_J2_4: MCU1.J2_4 Q1.1 | length 1318.4
  Bottom Layer w15.75: MCU1.J2_4 3785,2962.85 4424.16,3602.01 4568.15,3602.01 Q1.1
NetQ1_3: Q1.3 R1.1 R6.2 | length 542.3
  Top Layer w15.75: Q1.3 4449.84,3200.16 R6.2 R1.1
NetQ2_3: Q2.3 R2.1 R4.2 | length 542.3
  Top Layer w15.75: Q2.3 4834.84,3200.16 R4.2 R2.1
NetQ3_3: Q3.3 R3.1 R5.2 | length 537.3
  Top Layer w15.75: Q3.3 5209.84,3205.16 R5.2 R3.1
NetR11_2: R11.2 R12.1 R13.1 R14.1 R15.1 R16.1 R17.1 | length 720.7
  Top Layer w15.75: R11.2 6860,2390 R17.1 R16.1 R15.1 R14.1 R13.1 R12.1
pads on no net: IC3.9 MCU1.J1_1 MCU1.J1_2 MCU1.J1_3 MCU1.J1_4 MCU1.J1_5 MCU1.J1_6 MCU1.J1_7 MCU1.J1_8 MCU1.J1_9 MCU1.J1_11 MCU1.J1_12 MCU1.J1_13 MCU1.J2_1 MCU1.J2_5 MCU1.J2_6 MCU1.J2_12 MCU1.J2_13 MCU1.J2_15 MCU1.None

## Silkscreen, mask and mechanical layers (free items; w line width, h text height)
Mechanical 1:
  the board outline again, w10